# Altium PCB Headlight PCB.PcbDoc
Units mil, origin at the board's own origin, x right, y up, seen from the top; angles counter-clockwise.
Board outline 1250 x 175 mil, 4 copper layers (Top Layer, Ground, Power, Bottom Layer), stack 29.8 mil thick; 7 components, 4 nets, 11 pads, 10 vias.
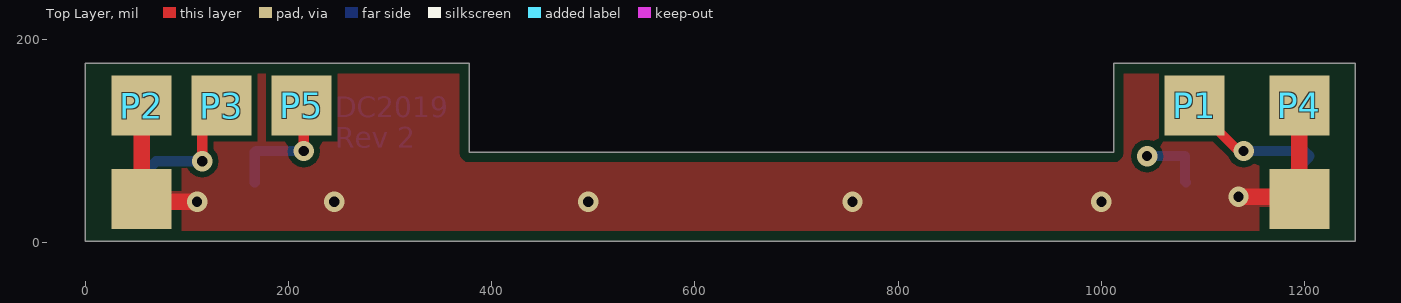
[diagram p0: Top Layer view]
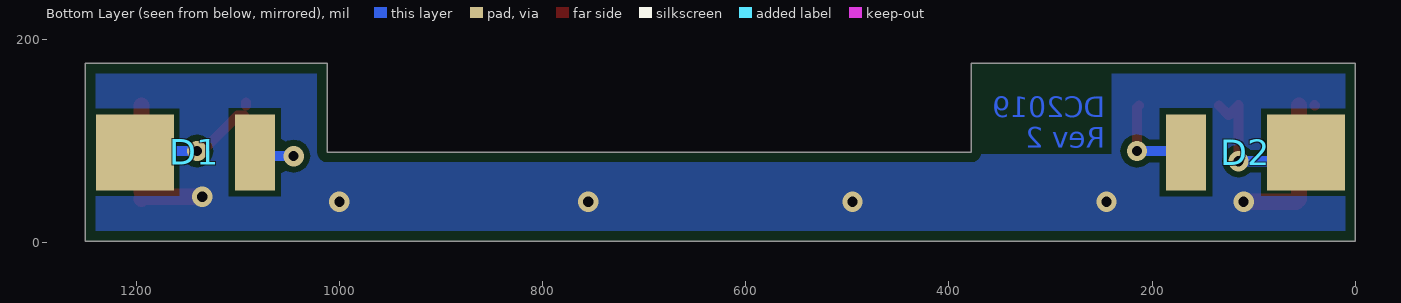
[diagram p1: Bottom Layer view, seen from below]
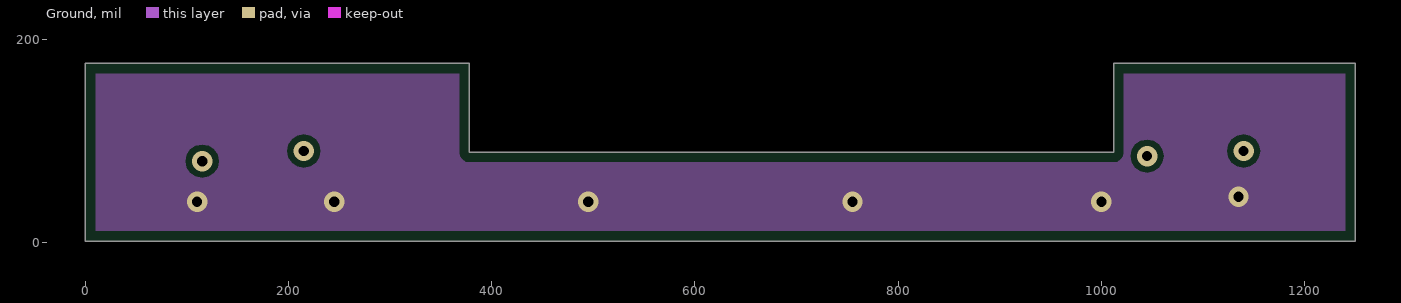
[diagram p2: Ground]
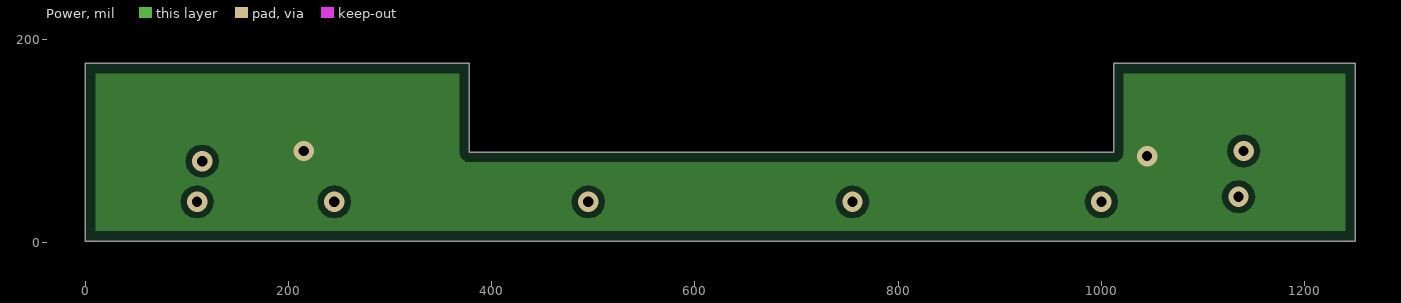
[diagram p3: Power]

## Layer stack, top to bottom
Top Solder: solder mask 0.4, Solder Resist, Dk 3.5
Top Layer: signal copper 1.4
Dielectric 2: prepreg 5.6, PP-006, Dk 4.1
Ground: signal copper 1.4
Dielectric 1: dielectric 13, FR-4, Dk 4.8
Power: signal copper 1.4
Dielectric 3: prepreg 5.6, PP-006, Dk 4.1
Bottom Layer: signal copper 1.4
Bottom Solder: solder mask 0.4, Solder Resist, Dk 3.5

## Board outline
0,1.27 0,176.27 378,176.27 378,89 1012,89 1012,176.27 1250,176.27 1250,1.27

## Design rules (kind name [scope] priority, off if disabled: settings)
BoardOutlineClearance [All] p1: gap=10 ignorepadtopadclearanceinfootprint=FALSE
Clearance [All] p1: gap=6 ignorepadtopadclearanceinfootprint=FALSE
DiffPairsRouting [All] p1: maxlimit=10 minlimit=6 mostfreqgap=6 toplayer_minwidth=6 toplayer_maxwidth=15 toplayer_prefwidth=8 midlayer1_minwidth=6 midlayer1_maxwidth=15 midlayer1_prefwidth=8 midlayer2_minwidth=6 midlayer2_maxwidth=15 midlayer2_prefwidth=8 bottomlayer_minwidth=6 bottomlayer_maxwidth=15 bottomlayer_prefwidth=8 maxuncoupledlength=500
HoleSize [All] p1: absolutevalues=TRUE maxlimit=150 minlimit=7.87 maxpercent=80.000 minpercent=20.000
HoleToHoleClearance [All] p1: gap=18 allowstackedmicrovias=TRUE
MinimumAnnularRing [All] p1: minimumring=5
MinimumSolderMaskSliver [All] p1: minsoldermaskwidth=6
PlaneClearance [All] p1: clearance=12
PlaneConnect PlaneConnect_IsVia [IsVia] p1: planeconnectstyle=Direct reliefexpansion=20 reliefentries=4 reliefconductorwidth=10 reliefairgap=10
PlaneConnect [All] p2: planeconnectstyle=Relief reliefexpansion=20 reliefentries=4 reliefconductorwidth=15 reliefairgap=12
PolygonConnect PolygonConnect_IsVia [IsVia] p1: connectstyle=Direct reliefconductorwidth=10 reliefentries=4 polygonreliefangle="45 Angle" airgapwidth=10
PolygonConnect [All] p2: connectstyle=Relief reliefconductorwidth=15 reliefentries=4 polygonreliefangle="90 Angle" airgapwidth=10
RoutingVias [All] p1: holewidth=7.87 width=14.17 viastyle="Through Hole" minholewidth=7.87 minwidth=13.78 maxholewidth=28 maxwidth=50
SilkToSilkClearance [All] p1: silktosilkclearance=6
SilkToSolderMaskClearance [IsPad] p1: minsilkscreentomaskgap=6 clearancetoexposedcopper=TRUE
SolderMaskExpansion [Not IsVia] p1: expansion=4
Width [All] p1: maxlimit=50 minlimit=4 preferedwidth=6
22 further rules are at their usual default settings.

## Components (designator, comment, footprint, x,y, rotation, side; value= is the part's Value field where it differs from the comment)
D1 "2835 LED" "2835 LED" 1201.33,88.77 r180 bottom
D2 "2835 LED" "2835 LED" 48.67,88.77 r0 bottom
P1 "1p SMD Pads" "1p SMD pad"#1 1075,145 r0 top
P2 "1p SMD Pads" "1p SMD pad"#2 76.53,137.23 r0 top
P3 "1p SMD Pads" "1p SMD pad"#3 -704.75,132.23 r0 top
P4 "1p SMD Pads" "1p SMD pad"#4 1214.7,137.23 r0 top
P5 "1p SMD Pads" "1p SMD pad"#5 205.83,130 r0 top

## Footprints (in the part's own frame and the unit in brackets; to place one, negate y for a bottom-side part, rotate by r counter-clockwise, add the part's x,y. Pads: shape width x height; smd on the part's side, far side on the other; paste and mask are expansions set on the pad)
"1p SMD pad"#1 [mm]
  rect 1.5x1.5 smd: 1(0.428,-0.259)
"1p SMD pad"#2 [mm]
  rect 1.5x1.5 smd: 1(-0.536,-0.062)
"1p SMD pad"#3 [mm]
  rect 1.5x1.5 smd: 1(21.309,0.065)
"1p SMD pad"#4 [mm]
  rect 1.5x1.5 smd: 1(-0.505,-0.062)
"1p SMD pad"#5 [mm]
  rect 1.5x1.5 smd: 1(0.18,0.122)
"2835 LED" [mm]
  rect 1x1.9 smd: 1(3,0)
  rect 1.95x1.9 smd: 2(0,0)

## Part data
D1 D2: "White LED Songxin Light"
P1 P2 P3 P4 P5: library part "1p SMD"

## Free pads (board coordinates)
  rect 59.06x59.06 smd: 10(55.43,42.8) 10(1194.8,42.8)

## Via types
v1: diameter 20, hole 10, Top Layer to Bottom Layer, tented both sides, 10 vias

## Nets (pads, with @x,y where several pads share a name; then routed paths per layer and width w, separated by ;. In a path a pad name is that pad's centre, name@x,y a point inside that pad or via, vN(x,y) a via of type N, cw(c..) or ccw(c..) an arc to the next point about the centre after c; other vN are vias at no path point)
3v3: D1.1 D2.1 P5.1 | length 187.7
  Top Layer w10: P5.1 215,132.72 v1(215,90)
  Bottom Layer w10: D2.1@166.78,59.06 D2.1 168.01,90 v1(215,90) ; v1(1045,85) 1082.28,85 1082.28,60 D1.1@1083.22,59.06
"DS HLIGHT": D2.2 P3.1 | length 157.1
  Top Layer w10: v1(115,80) 115,135 124.69,125.31 P3.1
  Bottom Layer w10: D2.2@48.67,59.06 69.61,80 v1(115,80)
GND: P2.1 P4.1 pad.10 | length 305.3
  Top Layer w10: P2.1@40,134.72 P2.1@40.28,135
  Top Layer w12: pad.10@55.42,44.58 pad.10@60,40 ; pad.10@1190,45 pad.10@1194.81,49.81
  Top Layer w16: pad.10@55.43,42.8 58.23,40 60,40 v1(110,40) ; pad.10@55.42,44.58 P2.1 ; v1(1135,45) 1190,45 1192.6,45 pad.10@1194.8,42.8 ; pad.10@1194.81,49.81 P4.1
  other v1: 245,40 495,40 755,40 1000,40
"PS HLIGHT": D1.2 P1.1 | length 167.6
  Top Layer w10: P1.1 P1.1@1091.85,137.8 ; P1.1@1093.7,125 1100,125 1135,90 v1(1140,90)
  Bottom Layer w10: v1(1140,90) 1200,90 1205,85 1190.19,70.19 D1.2@1201.33,59.06

## Polygon pours and split planes (outlines as drawn)
GND on Ground "Ground-GND" (solid, remove dead copper, pour order 2): 0,0 0,185 1255,185 1255,0
3v3 on Power "Power-GND" (solid, remove dead copper, pour order 4): 0,0 0,185 1255,185 1255,0
GND on Bottom Layer "Bottom Layer-GND" (solid, remove dead copper, pour order 8): 0,0 0,190 1260,190 1260,0
GND on Top Layer "Top Layer-GND" (solid, remove dead copper, pour order 0): 0,180 0,0 1280,0 1280,180

## Other copper
Bottom Layer:
  text "DC2019 / Rev 2" at 246,93 h20

## Silkscreen, mask and mechanical layers (free items; w line width, h text height)
Mechanical 3:
  the board outline again, w0.5